# EAGLE board Prototyp-V-0.2 (EAGLE 6.6.0)
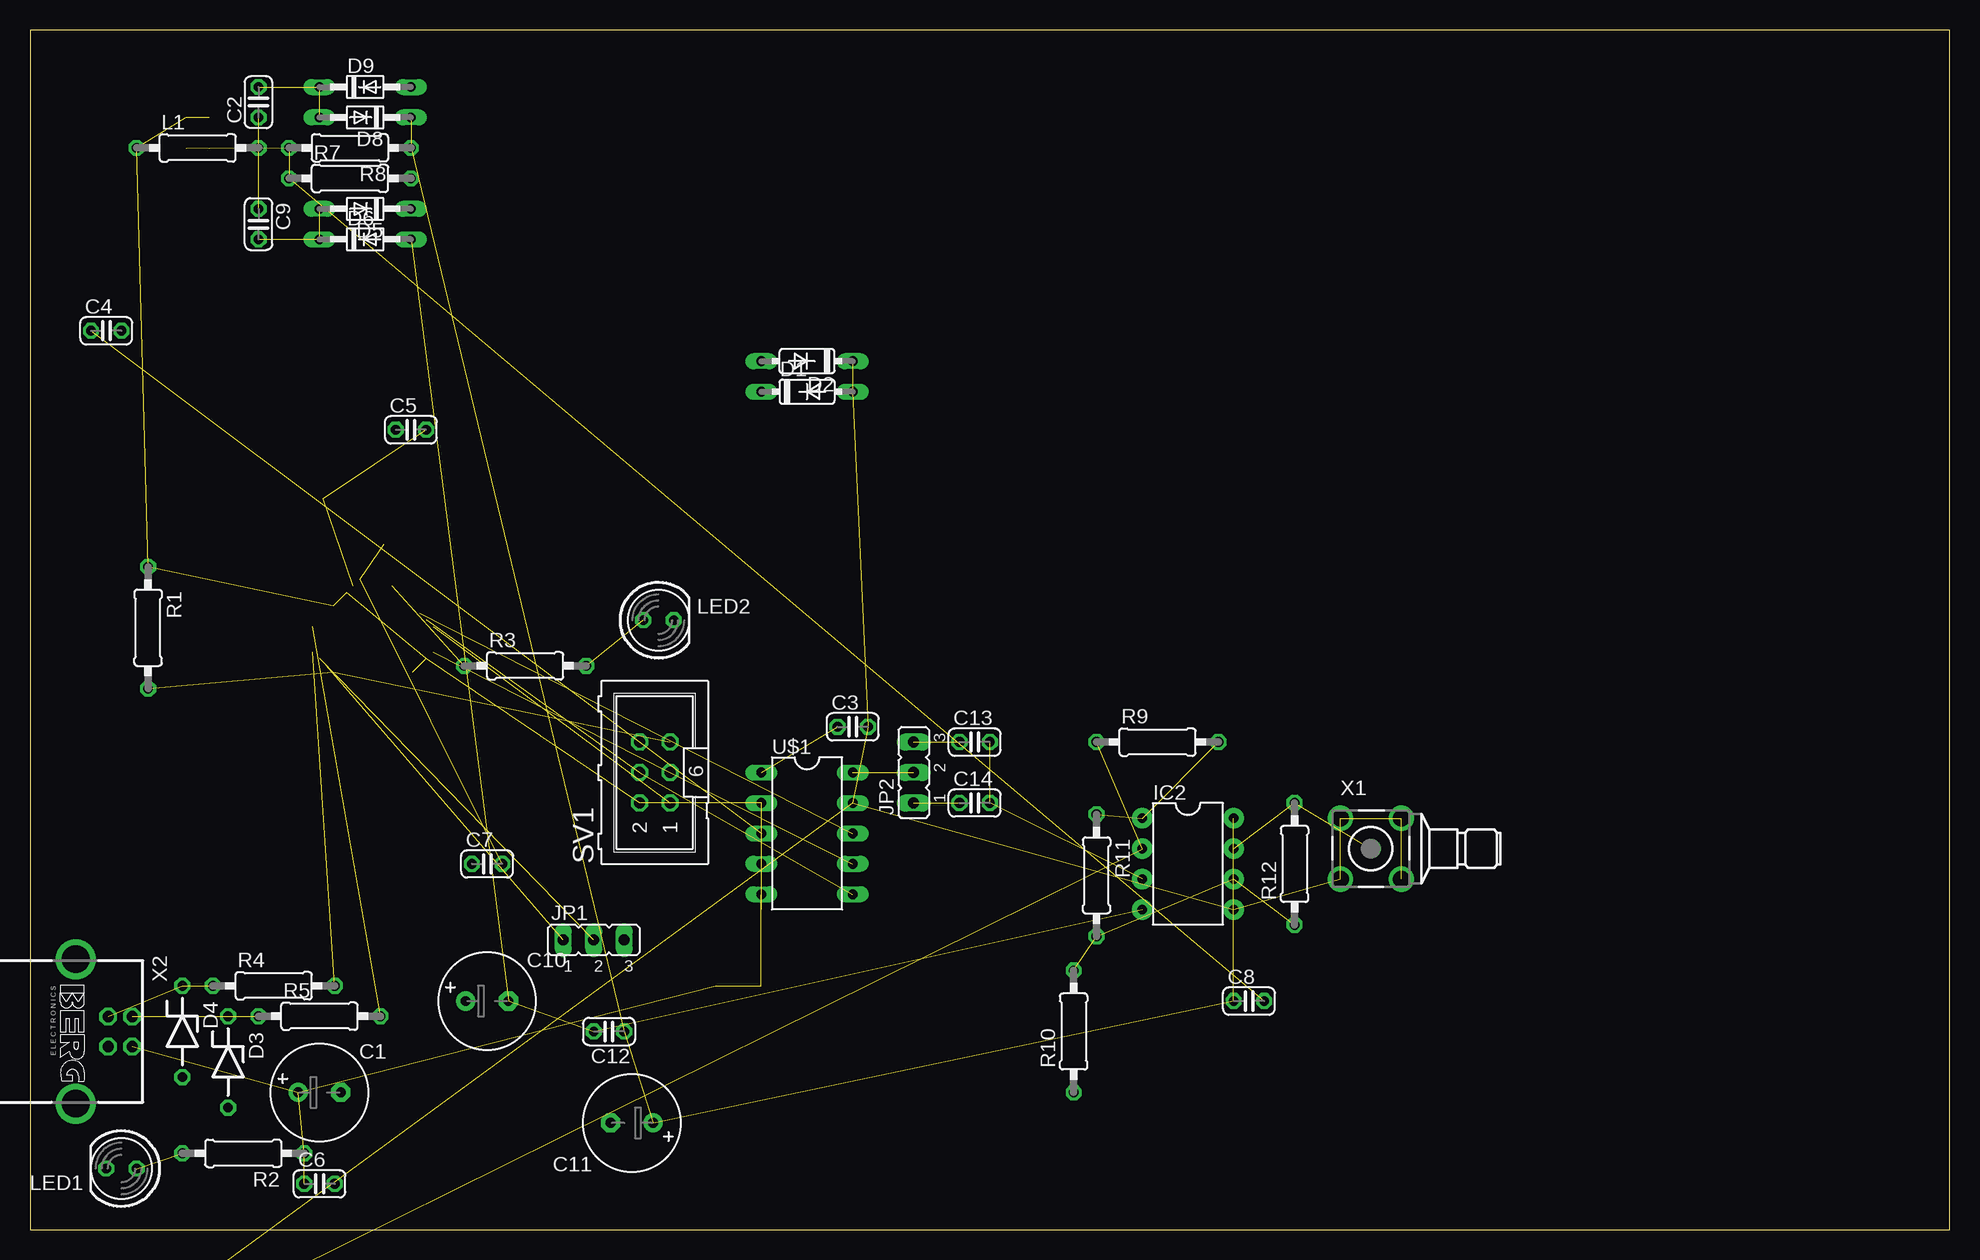
[diagram p0: board, top side]
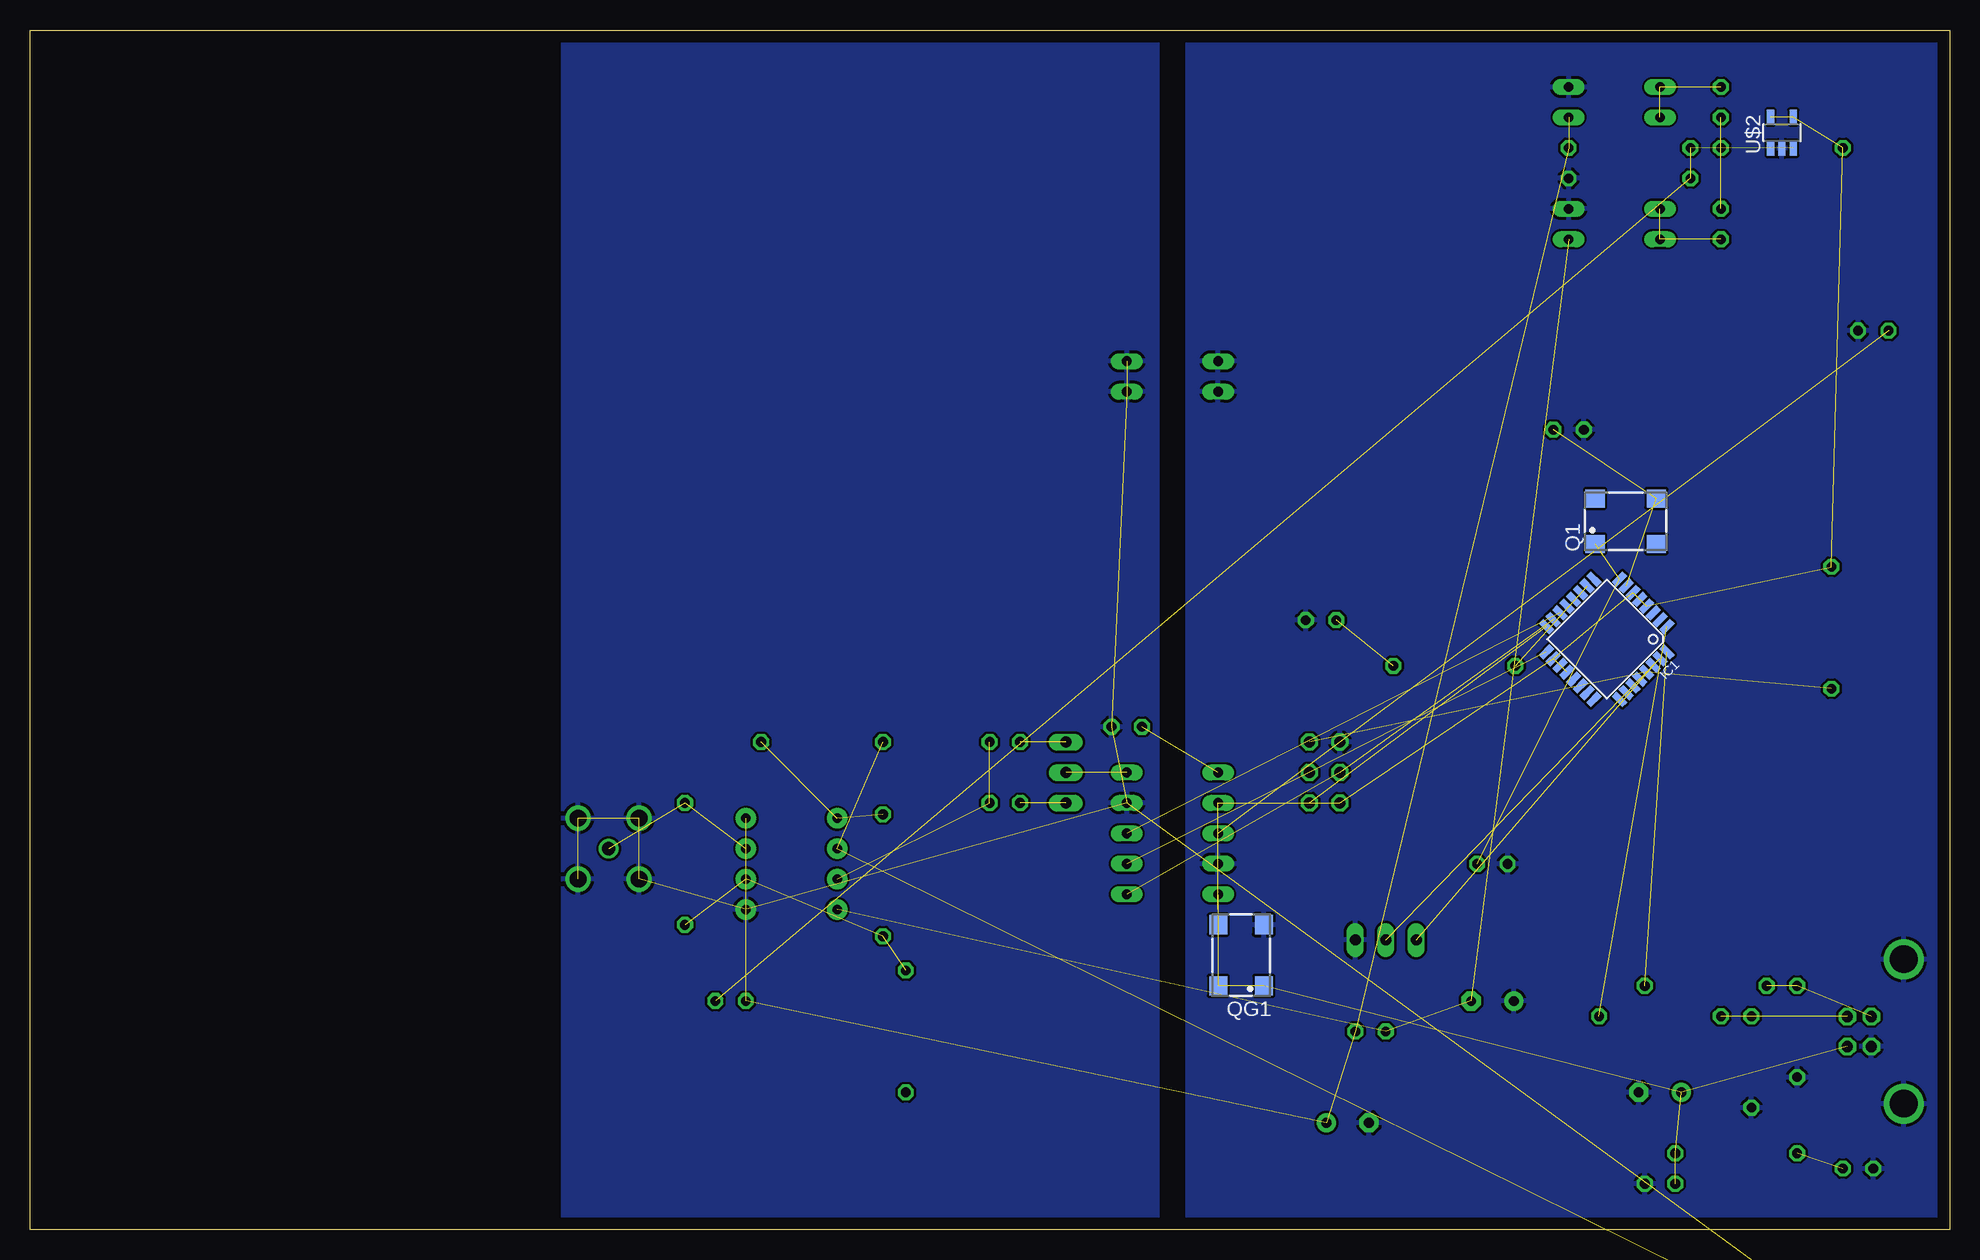
[diagram p1: board, bottom side, seen from below]

Size 160 x 100 mm. Coordinates in mm from the lower left corner, seen from the top.
Outline: 0,0 160,0 160,100 0,100 0,0
Copper layers (1*16): Top 0.035mm / dielectric 1.5mm / Bottom 0.035mm
Design rules "default": minimum track width 10mil, minimum drill 24mil, track to track 8mil, track to pad 8mil, pad to pad 8mil, via to via 8mil, smd to smd 8mil, copper to edge 40mil, drill to drill 8mil, minimum pad ring 10mil, minimum via ring 8mil, stop-mask expansion 4mil, vias tented up to drill 0mil, thermal gap 10mil

## Footprints (pad centres in the part's own frame; a part is rotated, then mirrored left to right if it is on the bottom)
E3,5-8 = drill 0.813 pad 1.6: + -1.778,0 | drill 0.813 pad 1.6 octagon: - 1.778,0
C025-024X044 = drill 0.813 octagon: 1 -1.27,0; 2 1.27,0
DO35-7 = drill 0.813 long: A 3.81,0; C -3.81,0
ZDIO-7.5 = drill 0.813 octagon: A 3.81,0; C -3.81,0
DO34-7 = drill 0.813 long: A 3.81,0; C -3.81,0
SOT23 = smd 1 x 1.4: 1 -0.95,-1.1; 2 0.95,-1.1; 3 0,1.1
TQFP32-08 = smd 1.27 x 0.559: 1 -4.293,2.8; 2 -4.293,2; 3 -4.293,1.2; 4 -4.293,0.4; 5 -4.293,-0.4; 6 -4.293,-1.2; 7 -4.293,-2; 8 -4.293,-2.8; 17 4.293,-2.8; 18 4.293,-2; 19 4.293,-1.2; 20 4.293,-0.4; 21 4.293,0.4; 22 4.293,1.2; 23 4.293,2; 24 4.293,2.8 | smd 0.559 x 1.27: 9 -2.8,-4.293; 10 -2,-4.293; 11 -1.2,-4.293; 12 -0.4,-4.293; 13 0.4,-4.293; 14 1.2,-4.293; 15 2,-4.293; 16 2.8,-4.293; 25 2.8,4.293; 26 2,4.293; 27 1.2,4.293; 28 0.4,4.293; 29 -0.4,4.293; 30 -1.2,4.293; 31 -2,4.293; 32 -2.8,4.293
DIL08 = drill 0.813 pad 1.676: 1 -3.81,-3.81; 2 -1.27,-3.81; 3 1.27,-3.81; 4 3.81,-3.81; 5 3.81,3.81; 6 1.27,3.81; 7 -1.27,3.81; 8 -3.81,3.81
JP2 = drill 0.914 long: 1 -2.54,0; 2 0,0; 3 2.54,0
0207/10 = drill 0.813 octagon: 1 -5.08,0; 2 5.08,0
LED5MM = drill 0.813 octagon: A -1.27,0; K 1.27,0
SM77H = smd 1.6 x 1.5: 1 -2.55,-1.9; 2 2.55,-1.9; 3 2.55,1.9; 4 -2.55,1.9
ML6 = drill 0.914 octagon: 1 -2.54,-1.27; 2 -2.54,1.27; 3 0,-1.27; 4 0,1.27; 5 2.54,-1.27; 6 2.54,1.27
DIL10 = drill 0.813 long: 1 -5.08,-3.81; 2 -2.54,-3.81; 3 0,-3.81; 4 2.54,-3.81; 5 5.08,-3.81; 6 5.08,3.81; 7 2.54,3.81; 8 0,3.81; 9 -2.54,3.81; 10 -5.08,3.81
SOT23-5 = smd 0.6 x 1.2: 1 -0.95,-1.306; 2 0,-1.306; 3 0.95,-1.306; 4 0.95,1.306; 5 -0.95,1.306
TSSOP20 = smd 0.305 x 0.991: 1 -3.575,-2.918; 2 -2.925,-2.918; 3 -2.275,-2.918; 4 -1.625,-2.918; 5 -0.975,-2.918; 6 -0.325,-2.918; 7 0.325,-2.918; 8 0.975,-2.918; 9 1.625,-2.918; 10 2.275,-2.918; 11 2.275,2.918; 12 1.625,2.918; 13 0.975,2.918; 14 0.325,2.918; 15 -0.325,2.918; 16 -0.975,2.918; 17 -1.625,2.918; 18 -2.275,2.918; 19 -2.925,2.918; 20 -3.575,2.918
BU-SMB-H = drill 1.1: 1 0,0 | drill 1.4: 2 -2.54,2.54; 3 2.54,2.54; 4 2.54,-2.54; 5 -2.54,-2.54
PN61729-S = drill 0.95 octagon: 1 1.25,4.71; 2 -1.25,4.71; 3 -1.25,2.71; 4 1.25,2.71 | drill 2.3 pad 2.9: S1 -6.02,0; S2 6.02,0

## Placement (x,y rotation side)
C1  [E3,5-8]  24.13,11.43 0 top
C2  [C025-024X044]  19.05,93.98 90 top
C3  [C025-024X044]  68.58,41.91 0 top
C4  [C025-024X044]  6.35,74.93 0 top
C5  [C025-024X044]  31.75,66.67 0 top
C6  [C025-024X044]  24.13,3.81 0 top
C7  [C025-024X044]  38.1,30.48 0 top
C8  [C025-024X044]  101.6,19.05 0 top
C9  [C025-024X044]  19.05,83.82 270 top
C10  [E3,5-8]  38.1,19.05 0 top
C11  [E3,5-8]  50.16,8.89 180 top
C12  [C025-024X044]  48.26,16.51 180 top
C13  10nF  [C025-024X044]  78.74,40.64 0 top
C14  220µF  [C025-024X044]  78.74,35.56 0 top
D1  1N4148DO35-7  [DO35-7]  64.77,69.85 0 top
D2  1N4148DO35-7  [DO35-7]  64.77,72.39 180 top
D3  3V3  [ZDIO-7.5]  16.51,13.97 270 top
D4  3V3  [ZDIO-7.5]  12.7,16.51 270 top
D5  BAT81  [DO34-7]  27.94,85.09 180 top
D6  BAT81  [DO34-7]  27.94,82.55 0 top
D7  BAT54S  [SOT23]  -3.81,-3.81 0 top
D8  BAT81  [DO34-7]  27.94,92.71 180 top
D9  BAT81  [DO34-7]  27.94,95.25 0 top
IC1  MEGA8-AI  [TQFP32-08]  28.57,49.21 225 bottom
IC2  NE5532N  [DIL08]  96.52,30.48 270 top
JP1  [JP2]  46.99,24.13 0 top
JP2  [JP2]  73.66,38.1 90 top
L1  [0207/10]  13.97,90.17 0 top
LED1  [LED5MM]  7.62,5.08 180 top
LED2  [LED5MM]  52.39,50.8 0 top
Q1  [SM77H]  26.99,59.05 0 bottom
QG1  SM77H  [SM77H]  59.05,22.86 90 bottom
R1  [0207/10]  9.84,50.16 270 top
R2  [0207/10]  17.78,6.35 180 top
R3  [0207/10]  41.27,46.99 0 top
R4  68R  [0207/10]  20.32,20.32 0 top
R5  68R  [0207/10]  24.13,17.78 0 top
R7  [0207/10]  26.67,87.63 0 top
R8  [0207/10]  26.67,90.17 180 top
R9  100k  [0207/10]  93.98,40.64 0 top
R10  10k  [0207/10]  87,16.51 90 top
R11  10k  [0207/10]  88.9,29.53 270 top
R12  10k  [0207/10]  105.41,30.48 90 top
SV1  [ML6]  52.07,38.1 90 top
U$1  AD9833-P  [DIL10]  64.77,33.02 270 top
U$2  LT1615  [SOT23-5]  13.97,91.44 0 bottom
U$3  AD5144A  [TSSOP20]  -0.64,-11.43 0 top  (outside the outline)
X1  BU-SMB-H  [BU-SMB-H]  111.76,31.75 0 top
X2  PN61729-S  [PN61729-S]  3.81,16.51 270 top

## Library data of the parts
C1-C14 L1 R1-R5 R7-R12 = rcl
D1-D9 = diode
IC1 = atmel; MPN: ATMEGA8-16AU; OC_FARNELL: 9171371; OC_NEWARK: 73M8863
IC2 U$2 = linear
JP1 JP2 = jumper
LED1 LED2 = led
Q1 = crystal
QG1 = crystal; OC_FARNELL: unknown; OC_NEWARK: unknown
SV1 = con-harting-ml; OC_FARNELL: unknown; OC_NEWARK: unknown
U$1 U$3 = analog-devices
X1 = con-coax; OC_FARNELL: unknown; OC_NEWARK: unknown
X2 = con-berg; OC_FARNELL: unknown; OC_NEWARK: unknown

## Nets
+12V: C8.1 C11.+ C12.1 D8.C IC2.8 R8.1
-12V: C10.- C12.2 D6.A IC2.4
AGND: C3.2 D1.A D2.C IC2.5 U$1.9 U$3.8 X1.2 X1.3 X1.4 X1.5
DGND: C1.- C4.2 C5.1 C6.2 C7.1 C10.+ C11.- D1.C D2.A D3.A D4.A D5.C D9.A IC1.3 IC1.5 IC1.21 JP1.3 LED1.K LED2.K QG1.2 R7.2 SV1.6 U$1.4 U$2.2 X2.4 X2.S1 X2.S2
N$1: C5.2 IC1.7 Q1.3
N$2: C7.2 IC1.8 Q1.1
N$3: C3.1 U$1.1
N$4: IC1.17 SV1.3 U$1.7
N$5: IC1.29 R1.2 SV1.5
N$6: IC1.15 SV1.4 U$1.6
N$7: IC1.14 U$1.8
N$8: IC1.16 SV1.1
N$9: C4.1 U$1.3
N$10: IC1.10 R3.1
N$11: QG1.3 U$1.5
N$12: IC1.32 R4.2
N$13: IC1.1 R5.2
N$14: D3.C R5.1 X2.2
N$15: D4.C R4.1 X2.3
N$16: IC1.30 JP1.1
N$17: LED1.A R2.2
N$18: LED2.A R3.2
N$19: IC1.31 JP1.2
N$20: C8.2 R7.1 R8.2 U$2.3
N$21: JP2.2 U$1.10
N$22: C9.2 D5.A D6.C
N$23: C2.1 C9.1 L1.2 U$2.1
N$24: C14.1 JP2.1
N$25: C2.2 D8.A D9.C
N$26: C13.1 JP2.3
N$27: IC2.2 R9.1 U$3.6 U$3.7
N$28: C13.2 C14.2 IC2.3
N$29: IC2.1 R9.2 R11.1
N$30: IC2.6 R10.2 R11.2 R12.1
N$31: IC2.7 R12.2 X1.1
VCC: C1.+ C6.1 IC1.4 IC1.6 IC1.18 IC1.20 L1.1 QG1.1 QG1.4 R1.1 R2.1 SV1.2 U$1.2 U$2.4 U$2.5 X2.1

## Tracks (layer width: path | path; a pad name or v marks a point on that pad's centre or on a via)
+12V  (5 unrouted)
-12V  (3 unrouted)
AGND  (9 unrouted)
  pour Bottom: 66.04,0 66.04,100.33 115.57,100.33 115.57,0
DGND
  pour Bottom: 0,0 63.5,0 63.5,100.33 0,100.33
N$1  (2 unrouted)
N$2  (2 unrouted)
N$3  (1 unrouted)
N$4  (2 unrouted)
N$5  (2 unrouted)
N$6  (2 unrouted)
N$7  (1 unrouted)
N$8  (1 unrouted)
N$9  (1 unrouted)
N$10  (1 unrouted)
N$11  (1 unrouted)
N$12  (1 unrouted)
N$13  (1 unrouted)
N$14  (2 unrouted)
N$15  (2 unrouted)
N$16  (1 unrouted)
N$17  (1 unrouted)
N$18  (1 unrouted)
N$19  (1 unrouted)
N$20  (3 unrouted)
N$21  (1 unrouted)
N$22  (2 unrouted)
N$23  (3 unrouted)
N$24  (1 unrouted)
N$25  (2 unrouted)
N$26  (1 unrouted)
N$27  (3 unrouted)
N$28  (2 unrouted)
N$29  (2 unrouted)
N$30  (3 unrouted)
N$31  (2 unrouted)
VCC  (15 unrouted)